# EAGLE board Qwiic GPS-RTK - ublox NEO-M8P-Panel (EAGLE 9.1.1), part 1 of 2
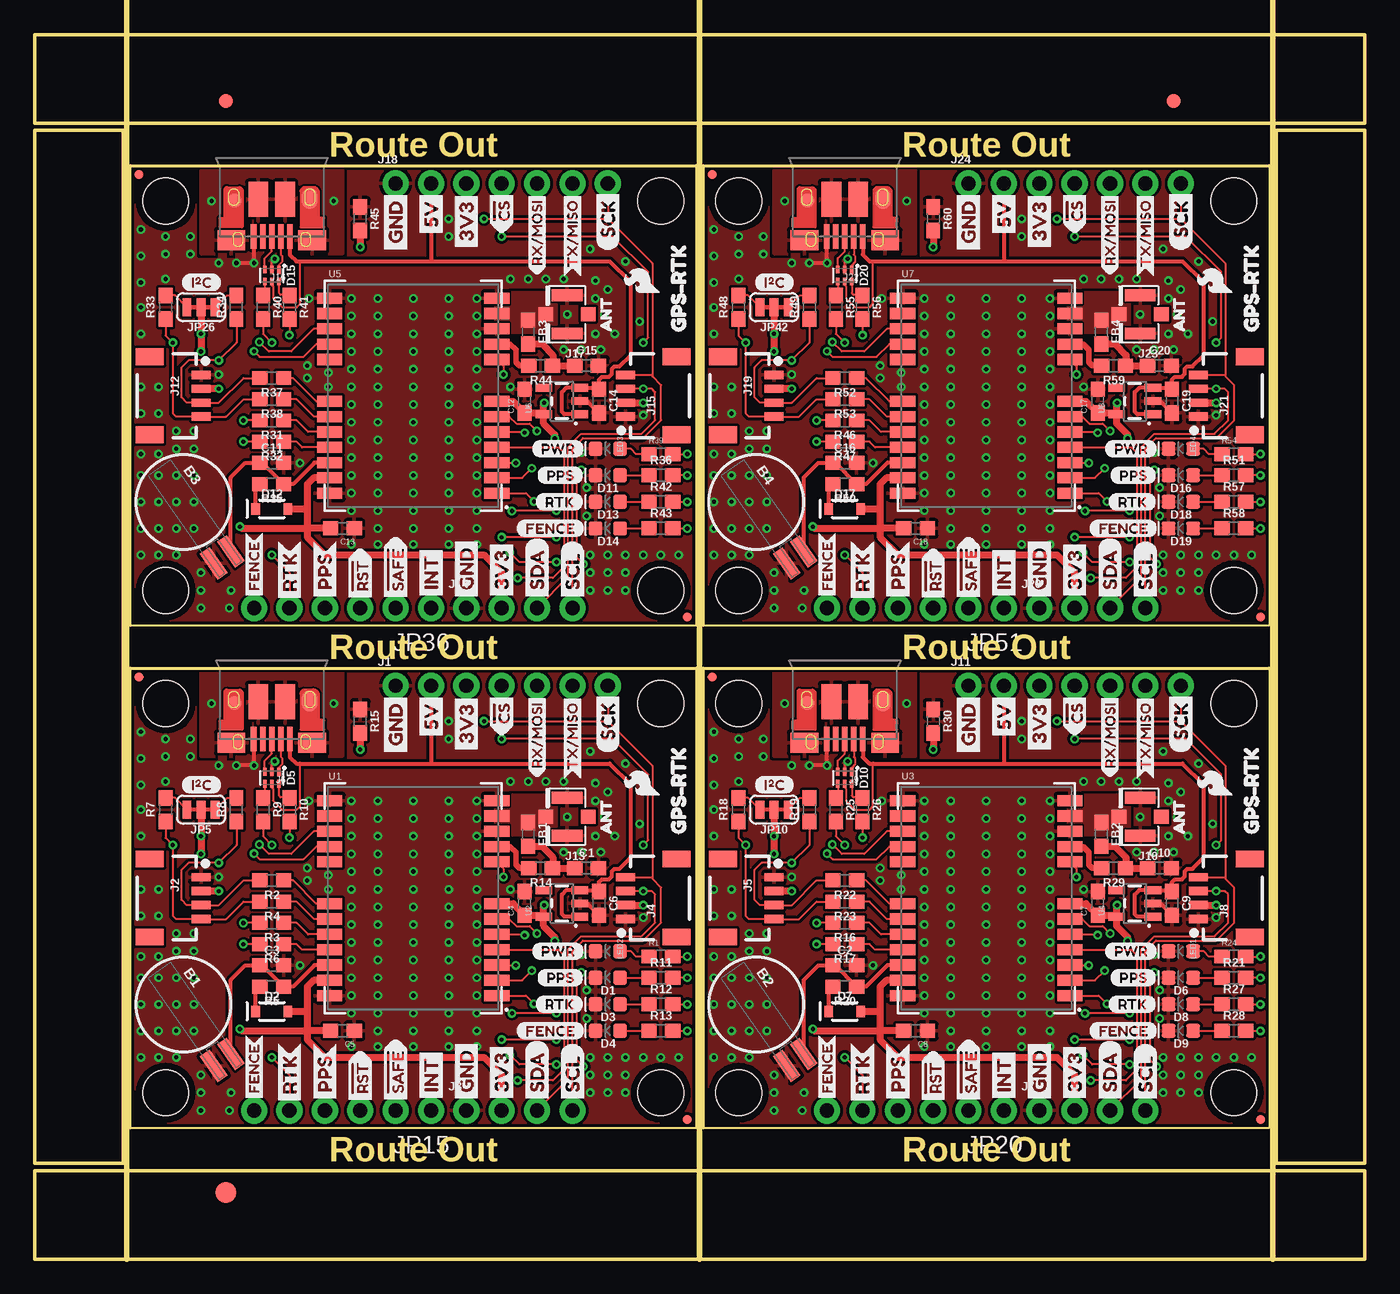
[diagram p0: board, top side]
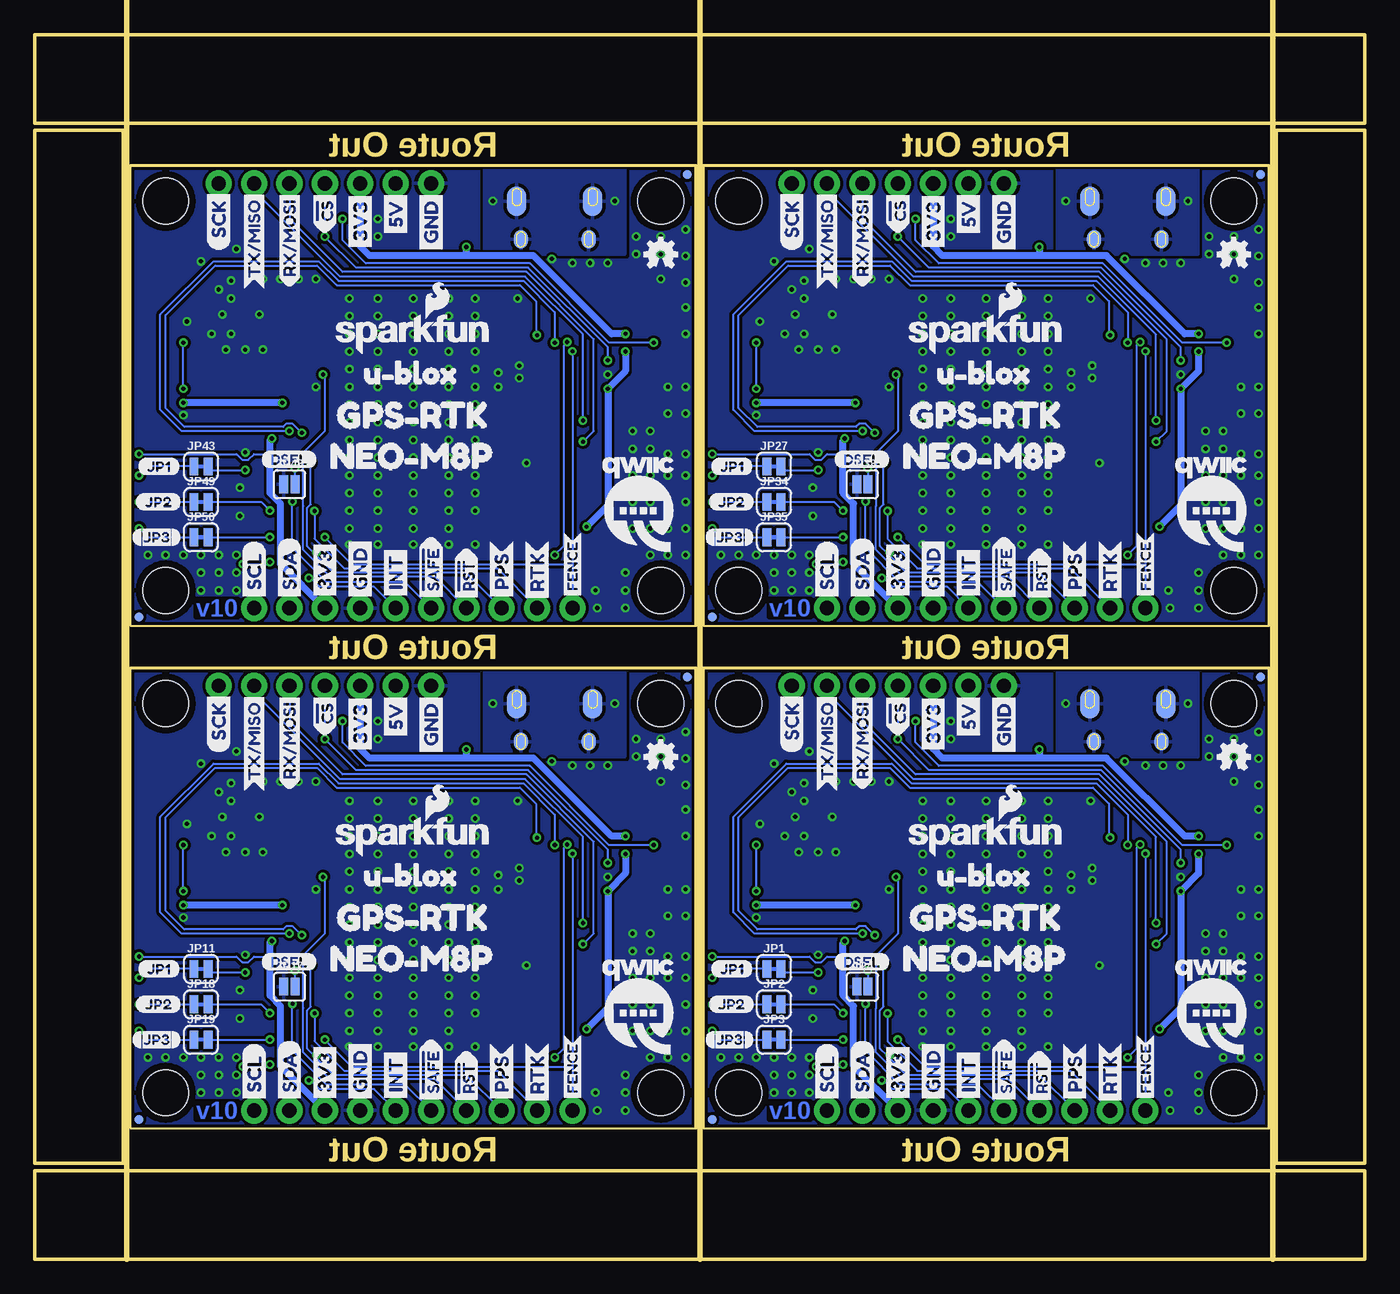
[diagram p1: board, bottom side, seen from below]

Size 95.5 x 87.88 mm. Coordinates in mm from the lower left corner, seen from the top.
Outline: 6.86,9.4 6.86,42.42 47.5,42.42 47.5,9.4 6.86,9.4
Outline: 48.01,9.4 48.01,42.42 88.65,42.42 88.65,9.4 48.01,9.4
Outline: 6.86,45.47 6.86,78.49 47.5,78.49 47.5,45.47 6.86,45.47
Outline: 48.01,45.47 48.01,78.49 88.65,78.49 88.65,45.47 48.01,45.47
Outline: 0,6.35 95.5,6.35 95.5,0 0,0 0,6.35
Outline: 89.15,81.03 95.5,81.03 95.5,6.86 89.15,6.86 89.15,81.03
Outline: 0,87.88 95.5,87.88 95.5,81.53 0,81.53 0,87.88
Outline: 0,81.03 6.35,81.03 6.35,6.86 0,6.86 0,81.03
Copper layers (1*16): Top 0.035mm / dielectric 1.5mm / Bottom 0.035mm
Design rules "SparkFun-2-layer-PCBWay-LIMIT": minimum track width 6mil, minimum drill 0.3mm, track to track 6mil, track to pad 6mil, pad to pad 6mil, via to via 6mil, smd to smd 6mil, copper to edge 6mil, drill to drill 6mil, minimum pad ring 6mil, minimum via ring 6mil, stop-mask expansion 4mil, vias tented up to drill 25mil, thermal gap 10mil
Net classes: 2 3.3V: width 0.508 mm
Milling: 3 lines

## Footprints (pad centres in the part's own frame; a part is rotated, then mirrored left to right if it is on the bottom)
BATTCON-6.8MM = smd 2.25 x 0.85: + 4.87,0.75; - 4.87,-0.75
0603 = smd 1.1 x 1: 1 -0.85,0; 2 0.85,0
LED-0603 = smd 1 x 1: A -0.877,0; C 0.877,0
SOD-323 = smd 0.63 x 0.83: A 1.15,0; C -1.15,0
SOT886 = smd 0.61 x 0.25: 1 -0.405,0.5 | smd 0.56 x 0.25: 2 -0.43,0; 3 -0.43,-0.5; 4 0.43,-0.5; 5 0.43,0; 6 0.43,0.5
FIDUCIAL-1X2 = smd 1 x 1: 1 0,0
FIDUCIAL-1.5X3 = smd 1.5 x 1.5: 1 0,0
1X07_NO_SILK = drill 1.016 pad 1.88: 1 0,0; 2 2.54,0; 3 5.08,0; 4 7.62,0; 5 10.16,0; 6 12.7,0; 7 15.24,0
1X04_1MM_RA = smd 0.6 x 1.35: 1 -1.5,0; 2 -0.5,0; 3 0.5,0; 4 1.5,0 | smd 1.2 x 2: NC1 2.8,-3.675; NC2 -2.8,-3.675
1X04_NO_SILK = drill 1.016 pad 1.88: 1 0,0; 2 2.54,0; 3 5.08,0; 4 7.62,0
USB-MICROB-PTH-MILL = smd 0.4 x 1.75: D+ 0,0; D- -0.65,0; GND 1.3,0; ID 0.65,0; VBUS -1.3,0 | smd 2 x 1.46: SHIELD -2.9,0.275; SHIELD2 2.9,0.275 | smd 1.425 x 2.5: SHIELD3 -0.963,-2.675; SHIELD4 0.963,-2.675 | smd 1.4 x 2.1 bottom: SHIELD5 -2.731,-2.531; SHIELD7 2.729,-2.531 | smd 1 x 1: SHIELD6 2.7,-2.575 | smd 1.1 x 1.5: SHIELD8 -2.731,-2.731 | smd 1 x 1.3 bottom: SHIELD9 -2.43,0.195; SHIELD10 2.43,0.195
U.FL = smd 2.2 x 0.85: 1 0,1.375; 2 0,-1.375 | smd 1.05 x 1: FEED 1.525,0; NC -1.525,0
SMT-JUMPER_2_NC_TRACE_SILK = smd 0.635 x 1.27: 1 -0.508,0; 2 0.508,0
SMT-JUMPER_2_NO_SILK = smd 0.635 x 1.27: 1 -0.406,0; 2 0.406,0
SMT-JUMPER_3_2-NC_TRACE_SILK = smd 0.635 x 1.27: 1 -1.016,0; 2 0,0; 3 1.016,0
STAND-OFF = hole 3.302: 0,0
MICRO-FIDUCIAL = smd 0.635 x 0.635: 1 0,0
1X06_NO_SILK = drill 1.016 pad 1.88: 1 0,0; 2 2.54,0; 3 5.08,0; 4 7.62,0; 5 10.16,0; 6 12.7,0
NEO-M8P = smd 1.8 x 0.8: 1 6,-7; 2 6,-5.9; 3 6,-4.8; 4 6,-3.7; 5 6,-2.6; 6 6,-1.5; 7 6,-0.4; 8 6,2.6; 9 6,3.7; 10 6,4.8; 11 6,5.9; 12 6,7; 13 -6,7; 14 -6,5.9; 15 -6,4.8; 16 -6,3.7; 17 -6,2.6; 18 -6,-0.4; 19 -6,-1.5; 20 -6,-2.6; 21 -6,-3.7; 22 -6,-4.8; 23 -6,-5.9; 24 -6,-7
SOT23-5 = smd 0.55 x 1.2: 1 -0.95,-1.3; 2 0,-1.3; 3 0.95,-1.3; 4 0.95,1.3; 5 -0.95,1.3

## Placement (x,y rotation side)
B1  6.8MM_COIN_CELL  [BATTCON-6.8MM]  10.67,18.29 305 top
B2  6.8MM_COIN_CELL  [BATTCON-6.8MM]  51.82,18.29 305 top
B3  6.8MM_COIN_CELL  [BATTCON-6.8MM]  10.67,54.36 305 top
B4  6.8MM_COIN_CELL  [BATTCON-6.8MM]  51.82,54.36 305 top
C1  47pF  [0603]  39.62,28.07 0 top
C2  1.0uF  [0603]  58.17,21.08 0 top
C3  1.0uF  [0603]  17.02,21.08 0 top
C4  1.0uF  [0603]  35.18,25.53 90 top
C5  0.1uF  [0603]  22.1,16.38 180 top
C6  1.0uF  [0603]  40.51,25.53 270 top
C7  1.0uF  [0603]  76.33,25.53 90 top
C8  0.1uF  [0603]  63.25,16.38 180 top
C9  1.0uF  [0603]  81.66,25.53 270 top
C10  47pF  [0603]  80.77,28.07 0 top
C11  1.0uF  [0603]  17.02,57.15 0 top
C12  1.0uF  [0603]  35.18,61.59 90 top
C13  0.1uF  [0603]  22.1,52.45 180 top
C14  1.0uF  [0603]  40.51,61.59 270 top
C15  47pF  [0603]  39.62,64.14 0 top
C16  1.0uF  [0603]  58.17,57.15 0 top
C17  1.0uF  [0603]  76.33,61.59 90 top
C18  0.1uF  [0603]  63.25,52.45 180 top
C19  1.0uF  [0603]  81.66,61.59 270 top
C20  47pF  [0603]  80.77,64.14 0 top
D1  Yellow  [LED-0603]  41.15,20.19 180 top
D2  0.5A/40V/420mV  [SOD-323]  17.02,17.78 0 top
D3  GREEN  [LED-0603]  41.15,18.29 180 top
D4  BLUE  [LED-0603]  41.15,16.38 180 top
D5  PRTR5V0U2F  [SOT886]  17.02,34.54 270 top
D6  Yellow  [LED-0603]  82.3,20.19 180 top
D7  0.5A/40V/420mV  [SOD-323]  58.17,17.78 0 top
D8  GREEN  [LED-0603]  82.3,18.29 180 top
D9  BLUE  [LED-0603]  82.3,16.38 180 top
D10  PRTR5V0U2F  [SOT886]  58.17,34.54 270 top
D11  Yellow  [LED-0603]  41.15,56.26 180 top
D12  0.5A/40V/420mV  [SOD-323]  17.02,53.85 0 top
D13  GREEN  [LED-0603]  41.15,54.36 180 top
D14  BLUE  [LED-0603]  41.15,52.45 180 top
D15  PRTR5V0U2F  [SOT886]  17.02,70.61 270 top
D16  Yellow  [LED-0603]  82.3,56.26 180 top
D17  0.5A/40V/420mV  [SOD-323]  58.17,53.85 0 top
D18  GREEN  [LED-0603]  82.3,54.36 180 top
D19  BLUE  [LED-0603]  82.3,52.45 180 top
D20  PRTR5V0U2F  [SOT886]  58.17,70.61 270 top
E$1  [FIDUCIAL-1X2]  13.72,83.12 0 top
E$2  [FIDUCIAL-1X2]  81.79,83.12 0 top
E$3  [FIDUCIAL-1.5X3]  13.72,4.76 0 top
FB1  30Ω/1.8A  [0603]  35.43,30.48 270 top
FB2  30Ω/1.8A  [0603]  76.58,30.48 270 top
FB3  30Ω/1.8A  [0603]  35.43,66.55 270 top
FB4  30Ω/1.8A  [0603]  76.58,66.55 270 top
J1  [1X07_NO_SILK]  25.91,41.15 0 top
J2  [1X04_1MM_RA]  11.94,25.91 270 top
J3  PTH  [1X04_NO_SILK]  30.99,10.67 0 top
J4  [1X04_1MM_RA]  42.42,25.91 90 top
J5  [1X04_1MM_RA]  53.09,25.91 270 top
J6  [USB-MICROB-PTH-MILL]  17.02,37.34 180 top
J7  PTH  [1X04_NO_SILK]  72.14,10.67 0 top
J8  [1X04_1MM_RA]  83.57,25.91 90 top
J9  [USB-MICROB-PTH-MILL]  58.17,37.34 180 top
J10  U.FL  [U.FL]  79.38,31.75 180 top
J11  [1X07_NO_SILK]  67.06,41.15 0 top
J12  [1X04_1MM_RA]  11.94,61.98 270 top
J13  U.FL  [U.FL]  38.23,31.75 180 top
J14  PTH  [1X04_NO_SILK]  30.99,46.74 0 top
J15  [1X04_1MM_RA]  42.42,61.98 90 top
J16  [USB-MICROB-PTH-MILL]  17.02,73.41 180 top
J17  U.FL  [U.FL]  38.23,67.82 180 top
J18  [1X07_NO_SILK]  25.91,77.22 0 top
J19  [1X04_1MM_RA]  53.09,61.98 270 top
J20  PTH  [1X04_NO_SILK]  72.14,46.74 0 top
J21  [1X04_1MM_RA]  83.57,61.98 90 top
J22  [USB-MICROB-PTH-MILL]  58.17,73.41 180 top
J23  U.FL  [U.FL]  79.38,67.82 180 top
J24  [1X07_NO_SILK]  67.06,77.22 0 top
JP1  [SMT-JUMPER_2_NC_TRACE_SILK]  42.42,20.83 0 bottom
JP2  [SMT-JUMPER_2_NC_TRACE_SILK]  42.42,18.29 0 bottom
JP3  [SMT-JUMPER_2_NC_TRACE_SILK]  42.42,15.75 0 bottom
JP4  [SMT-JUMPER_2_NO_SILK]  36.07,19.56 0 bottom
JP5  [SMT-JUMPER_3_2-NC_TRACE_SILK]  11.94,32.26 180 top
JP6  STAND-OFF  [STAND-OFF]  50.55,39.88 0 top
JP7  STAND-OFF  [STAND-OFF]  86.11,39.88 0 top
JP8  FIDUCIALUFIDUCIAL  [MICRO-FIDUCIAL]  88.01,10.03 0 top
JP9  FIDUCIALUFIDUCIAL  [MICRO-FIDUCIAL]  48.64,41.78 0 top
JP10  [SMT-JUMPER_3_2-NC_TRACE_SILK]  53.09,32.26 180 top
JP11  [SMT-JUMPER_2_NC_TRACE_SILK]  83.57,20.83 0 bottom
JP12  FIDUCIALUFIDUCIAL  [MICRO-FIDUCIAL]  88.01,10.03 0 bottom
JP13  FIDUCIALUFIDUCIAL  [MICRO-FIDUCIAL]  48.64,41.78 0 bottom
JP14  STAND-OFF  [STAND-OFF]  50.55,11.94 0 top
JP15  [1X06_NO_SILK]  28.45,10.67 180 top
JP16  STAND-OFF  [STAND-OFF]  86.11,11.94 0 top
JP17  [SMT-JUMPER_2_NO_SILK]  77.22,19.56 0 bottom
JP18  [SMT-JUMPER_2_NC_TRACE_SILK]  83.57,18.29 0 bottom
JP19  [SMT-JUMPER_2_NC_TRACE_SILK]  83.57,15.75 0 bottom
JP20  [1X06_NO_SILK]  69.6,10.67 180 top
JP21  FIDUCIALUFIDUCIAL  [MICRO-FIDUCIAL]  46.86,10.03 0 top
JP22  STAND-OFF  [STAND-OFF]  9.4,75.95 0 top
JP23  STAND-OFF  [STAND-OFF]  44.96,75.95 0 top
JP24  FIDUCIALUFIDUCIAL  [MICRO-FIDUCIAL]  46.86,46.1 0 top
JP25  FIDUCIALUFIDUCIAL  [MICRO-FIDUCIAL]  7.49,77.85 0 top
JP26  [SMT-JUMPER_3_2-NC_TRACE_SILK]  11.94,68.33 180 top
JP27  [SMT-JUMPER_2_NC_TRACE_SILK]  42.42,56.9 0 bottom
JP28  FIDUCIALUFIDUCIAL  [MICRO-FIDUCIAL]  46.86,46.1 0 bottom
JP29  FIDUCIALUFIDUCIAL  [MICRO-FIDUCIAL]  7.49,77.85 0 bottom
JP30  STAND-OFF  [STAND-OFF]  9.4,48.01 0 top
JP31  STAND-OFF  [STAND-OFF]  9.4,39.88 0 top
JP32  STAND-OFF  [STAND-OFF]  44.96,48.01 0 top
JP33  [SMT-JUMPER_2_NO_SILK]  36.07,55.63 0 bottom
JP34  [SMT-JUMPER_2_NC_TRACE_SILK]  42.42,54.36 0 bottom
JP35  [SMT-JUMPER_2_NC_TRACE_SILK]  42.42,51.82 0 bottom
JP36  [1X06_NO_SILK]  28.45,46.74 180 top
JP37  STAND-OFF  [STAND-OFF]  50.55,75.95 0 top
JP38  STAND-OFF  [STAND-OFF]  86.11,75.95 0 top
JP39  FIDUCIALUFIDUCIAL  [MICRO-FIDUCIAL]  88.01,46.1 0 top
JP40  FIDUCIALUFIDUCIAL  [MICRO-FIDUCIAL]  48.64,77.85 0 top
JP41  STAND-OFF  [STAND-OFF]  44.96,39.88 0 top
JP42  [SMT-JUMPER_3_2-NC_TRACE_SILK]  53.09,68.33 180 top
JP43  [SMT-JUMPER_2_NC_TRACE_SILK]  83.57,56.9 0 bottom
JP44  FIDUCIALUFIDUCIAL  [MICRO-FIDUCIAL]  88.01,46.1 0 bottom
JP45  FIDUCIALUFIDUCIAL  [MICRO-FIDUCIAL]  48.64,77.85 0 bottom
JP46  STAND-OFF  [STAND-OFF]  50.55,48.01 0 top
JP47  STAND-OFF  [STAND-OFF]  86.11,48.01 0 top
JP48  [SMT-JUMPER_2_NO_SILK]  77.22,55.63 0 bottom
JP49  [SMT-JUMPER_2_NC_TRACE_SILK]  83.57,54.36 0 bottom
JP50  [SMT-JUMPER_2_NC_TRACE_SILK]  83.57,51.82 0 bottom
JP51  [1X06_NO_SILK]  69.6,46.74 180 top
JP61  FIDUCIALUFIDUCIAL  [MICRO-FIDUCIAL]  7.49,41.78 0 top
JP71  FIDUCIALUFIDUCIAL  [MICRO-FIDUCIAL]  46.86,10.03 0 bottom
JP81  FIDUCIALUFIDUCIAL  [MICRO-FIDUCIAL]  7.49,41.78 0 bottom
JP91  STAND-OFF  [STAND-OFF]  9.4,11.94 0 top
JP101  STAND-OFF  [STAND-OFF]  44.96,11.94 0 top
LED1  RED  [LED-0603]  82.3,22.1 180 top
LED2  RED  [LED-0603]  41.15,22.1 180 top
LED3  RED  [LED-0603]  41.15,58.17 180 top
LED4  RED  [LED-0603]  82.3,58.17 180 top
LOGO1  OSHW-LOGOMINI  [OSHW-LOGO-MINI]  9.4,36.07 0 bottom
LOGO2  SFE_LOGO_NAME_FLAME.1_INCH  [SFE_LOGO_NAME_FLAME_.1]  33.15,28.83 0 bottom
LOGO3  OSHW-LOGOMINI  [OSHW-LOGO-MINI]  50.55,36.07 0 bottom
LOGO4  SFE_LOGO_NAME_FLAME.1_INCH  [SFE_LOGO_NAME_FLAME_.1]  74.3,28.83 0 bottom
LOGO5  OSHW-LOGOMINI  [OSHW-LOGO-MINI]  9.4,72.14 0 bottom
LOGO6  SFE_LOGO_NAME_FLAME.1_INCH  [SFE_LOGO_NAME_FLAME_.1]  33.15,64.9 0 bottom
LOGO7  OSHW-LOGOMINI  [OSHW-LOGO-MINI]  50.55,72.14 0 bottom
LOGO8  SFE_LOGO_NAME_FLAME.1_INCH  [SFE_LOGO_NAME_FLAME_.1]  74.3,64.9 0 bottom
R1  1k  [0603]  44.96,21.72 0 top
R2  33  [0603]  17.02,27.18 180 top
R3  33  [0603]  17.02,24.13 180 top
R4  33  [0603]  17.02,25.65 180 top
R5  1k  [0603]  17.02,19.56 180 top
R6  33  [0603]  17.02,22.61 180 top
R7  2.2k  [0603]  9.4,32.26 90 top
R8  2.2k  [0603]  14.48,32.26 90 top
R9  27  [0603]  16.38,32.26 270 top
R10  27  [0603]  18.29,32.26 270 top
R11  1k  [0603]  44.96,20.19 0 top
R12  1k  [0603]  44.96,18.29 0 top
R13  1k  [0603]  44.96,16.38 0 top
R14  10  [0603]  36.32,28.07 180 top
R15  100k  [0603]  23.37,38.61 270 top
R16  33  [0603]  58.17,24.13 180 top
R17  33  [0603]  58.17,22.61 180 top
R18  2.2k  [0603]  50.55,32.26 90 top
R19  2.2k  [0603]  55.63,32.26 90 top
R20  1k  [0603]  58.17,19.56 180 top
R21  1k  [0603]  86.11,20.19 0 top
R22  33  [0603]  58.17,27.18 180 top
R23  33  [0603]  58.17,25.65 180 top
R24  1k  [0603]  86.11,21.72 0 top
R25  27  [0603]  57.53,32.26 270 top
R26  27  [0603]  59.44,32.26 270 top
R27  1k  [0603]  86.11,18.29 0 top
R28  1k  [0603]  86.11,16.38 0 top
R29  10  [0603]  77.47,28.07 180 top
R30  100k  [0603]  64.52,38.61 270 top
R31  33  [0603]  17.02,60.2 180 top
R32  33  [0603]  17.02,58.67 180 top
R33  2.2k  [0603]  9.4,68.33 90 top
R34  2.2k  [0603]  14.48,68.33 90 top
R35  1k  [0603]  17.02,55.63 180 top
R36  1k  [0603]  44.96,56.26 0 top
R37  33  [0603]  17.02,63.25 180 top
R38  33  [0603]  17.02,61.72 180 top
R39  1k  [0603]  44.96,57.78 0 top
R40  27  [0603]  16.38,68.33 270 top
R41  27  [0603]  18.29,68.33 270 top
R42  1k  [0603]  44.96,54.36 0 top
R43  1k  [0603]  44.96,52.45 0 top
R44  10  [0603]  36.32,64.14 180 top
R45  100k  [0603]  23.37,74.68 270 top
R46  33  [0603]  58.17,60.2 180 top
R47  33  [0603]  58.17,58.67 180 top
R48  2.2k  [0603]  50.55,68.33 90 top
R49  2.2k  [0603]  55.63,68.33 90 top
R50  1k  [0603]  58.17,55.63 180 top
R51  1k  [0603]  86.11,56.26 0 top
R52  33  [0603]  58.17,63.25 180 top
R53  33  [0603]  58.17,61.72 180 top
R54  1k  [0603]  86.11,57.78 0 top
R55  27  [0603]  57.53,68.33 270 top
R56  27  [0603]  59.44,68.33 270 top
R57  1k  [0603]  86.11,54.36 0 top
R58  1k  [0603]  86.11,52.45 0 top
R59  10  [0603]  77.47,64.14 180 top
R60  100k  [0603]  64.52,74.68 270 top
U1  NEO-M8P  [NEO-M8P]  27.18,25.91 0 top
U2  3.3V  [SOT23-5]  37.85,25.53 90 top
U3  NEO-M8P  [NEO-M8P]  68.33,25.91 0 top
U4  3.3V  [SOT23-5]  78.99,25.53 90 top
U5  NEO-M8P  [NEO-M8P]  27.18,61.98 0 top
U6  3.3V  [SOT23-5]  37.85,61.59 90 top
U7  NEO-M8P  [NEO-M8P]  68.33,61.98 0 top
U8  3.3V  [SOT23-5]  78.99,61.59 90 top
U$1  [SDA-[)]  36.07,11.05 90 top
U$2  [SDA-[)]  77.22,11.05 90 top
U$3  [SCL-[)]  38.61,11.05 90 top
U$4  [SDA-[)]  36.07,11.05 90 bottom
U$5  [SCL-[)]  38.61,11.05 90 bottom
U$6  [3V3-04]  33.53,11.05 90 top
U$7  [3V3-04]  33.53,11.05 90 bottom
U$8  [GND-04]  30.99,11.05 90 top
U$9  [GND-04]  30.99,11.05 90 bottom
U$10  [I_SUPER2_C-()-03]  10.54,34.04 0 top
U$11  [FENCE2]  34.54,16.38 0 top
U$12  [JP20]  47.12,18.29 0 bottom
U$13  [RTK1]  35.94,18.29 0 top
U$14  [FENCE0]  15.75,11.18 90 top
U$15  [INT8]  28.45,11.05 90 top
U$16  [INT8]  28.45,11.05 90 bottom
U$17  [FENCE0]  15.75,11.18 90 bottom
U$18  [PWR-()-03]  35.69,22.1 0 top
U$19  [5V]  28.45,37.08 90 top
U$20  [5V]  28.45,37.08 90 bottom
U$21  [GPS#RTK0]  46.23,29.59 90 top
U$22  [U#BLOX3]  32.13,27.56 0 bottom
U$23  [CS#-<]]  33.53,37.34 90 top
U$24  [CS#-<]]  33.53,37.34 90 bottom
U$25  [JP10]  46.99,20.83 0 bottom
U$26  [RX#MOSI2]  36.07,34.54 90 top
U$27  [DSEL0]  38.1,21.34 0 bottom
U$28  [RTK1]  18.29,10.92 90 bottom
U$29  [RTK1]  18.29,10.92 90 top
U$30  [QWIIC-LOGO-MEDIUM]  11.05,18.16 0 bottom
U$31  [RX#MOSI3]  36.07,33.66 90 bottom
U$32  [JP32]  47.37,15.75 0 bottom
U$33  [SFE_LOGO_FLAME_.1]  45.21,33.02 90 top
U$34  [TX#MISO0]  38.61,34.42 90 top
U$35  [#RST3]  23.37,10.79 90 top
U$36  [#RST3]  23.37,10.79 90 bottom
U$37  [TX#MISO1]  38.61,33.53 90 bottom
U$38  [SCK-(]-04]  41.15,36.32 90 top
U$39  [#SAFE1]  25.91,10.79 90 top
U$40  [#SAFE1]  25.91,10.79 90 bottom
U$41  [SCK-(]-04]  41.15,36.32 90 bottom
U$42  [SCL-[)]  79.76,11.05 90 top
U$43  [PPS5]  20.83,11.05 90 top
U$44  [PPS5]  20.83,11.05 90 bottom
U$45  [SDA-[)]  77.22,11.05 90 bottom
U$46  [SCL-[)]  79.76,11.05 90 bottom
U$47  [3V3-04]  74.68,11.05 90 top
U$48  [3V3-04]  74.68,11.05 90 bottom
U$49  [GND-04]  72.14,11.05 90 top
U$50  [GND-04]  72.14,11.05 90 bottom
U$51  [I_SUPER2_C-()-03]  51.69,34.04 0 top
U$52  [PPS0]  36.07,20.19 0 top
U$53  [NEO#M8P3]  34.8,21.59 0 bottom
U$54  [GPS#RTK1]  34.29,24.51 0 bottom
U$55  [ANT0]  41.02,29.84 90 top
U$56  [INT8]  69.6,11.05 90 top
U$57  [INT8]  69.6,11.05 90 bottom
U$58  [U#BLOX3]  73.28,27.56 0 bottom
U$59  [QWIIC-LOGO-MEDIUM]  52.2,18.16 0 bottom
U$60  [3V3-04]  30.99,36.07 90 bottom
U$61  [3V3-04]  30.99,36.07 90 top
U$62  [GND-04]  25.91,35.94 90 bottom
U$63  [GND-04]  25.91,35.94 90 top
U$64  [#RST3]  64.52,10.79 90 top
U$65  [#RST3]  64.52,10.79 90 bottom
U$66  [#SAFE1]  67.06,10.79 90 top
U$67  [#SAFE1]  67.06,10.79 90 bottom
U$68  [PPS5]  61.98,11.05 90 top
U$69  [PPS5]  61.98,11.05 90 bottom
U$70  [PPS0]  77.22,20.19 0 top
U$71  [FENCE2]  75.69,16.38 0 top
U$72  [JP20]  88.27,18.29 0 bottom
U$73  [RTK1]  77.09,18.29 0 top
U$74  [FENCE0]  56.9,11.18 90 top
U$75  [FENCE0]  56.9,11.18 90 bottom
U$76  [RTK1]  59.44,10.92 90 bottom
U$77  [RTK1]  59.44,10.92 90 top
U$78  [3V3-04]  72.14,36.07 90 bottom
U$79  [3V3-04]  72.14,36.07 90 top
U$80  [GND-04]  67.06,35.94 90 bottom
U$81  [GND-04]  67.06,35.94 90 top
U$82  [GPS#RTK0]  87.38,29.59 90 top
U$83  [JP10]  88.14,20.83 0 bottom
U$84  [JP32]  88.52,15.75 0 bottom
U$85  [DSEL0]  79.25,21.34 0 bottom
U$86  [NEO#M8P3]  75.95,21.59 0 bottom
U$87  [GPS#RTK1]  75.44,24.51 0 bottom
U$88  [ANT0]  82.17,29.84 90 top
U$89  [PWR-()-03]  76.84,22.1 0 top
U$90  [5V]  69.6,37.08 90 top
U$91  [5V]  69.6,37.08 90 bottom
U$92  [CS#-<]]  74.68,37.34 90 top
U$93  [CS#-<]]  74.68,37.34 90 bottom
U$94  [SCK-(]-04]  82.3,36.32 90 top
U$95  [SCK-(]-04]  82.3,36.32 90 bottom
U$96  [SFE_LOGO_FLAME_.1]  86.36,33.02 90 top
U$97  [RX#MOSI2]  77.22,34.54 90 top
U$98  [RX#MOSI3]  77.22,33.66 90 bottom
U$99  [TX#MISO0]  79.76,34.42 90 top
U$100  [TX#MISO1]  79.76,33.53 90 bottom
U$101  [SDA-[)]  36.07,47.12 90 top
U$102  [SCL-[)]  38.61,47.12 90 top
U$103  [SDA-[)]  36.07,47.12 90 bottom
U$104  [SCL-[)]  38.61,47.12 90 bottom
U$105  [3V3-04]  33.53,47.12 90 top
U$106  [3V3-04]  33.53,47.12 90 bottom
U$107  [GND-04]  30.99,47.12 90 top
U$108  [GND-04]  30.99,47.12 90 bottom
U$109  [I_SUPER2_C-()-03]  10.54,70.1 0 top
U$110  [INT8]  28.45,47.12 90 top
U$111  [INT8]  28.45,47.12 90 bottom
U$112  [U#BLOX3]  32.13,63.63 0 bottom
U$113  [QWIIC-LOGO-MEDIUM]  11.05,54.23 0 bottom
U$114  [#RST3]  23.37,46.86 90 top
U$115  [#RST3]  23.37,46.86 90 bottom
U$116  [#SAFE1]  25.91,46.86 90 top
U$117  [#SAFE1]  25.91,46.86 90 bottom
U$118  [PPS5]  20.83,47.12 90 top
U$119  [PPS5]  20.83,47.12 90 bottom
U$120  [PPS0]  36.07,56.26 0 top
U$121  [FENCE2]  34.54,52.45 0 top
U$122  [JP20]  47.12,54.36 0 bottom
U$123  [RTK1]  35.94,54.36 0 top
U$124  [FENCE0]  15.75,47.24 90 top
U$125  [FENCE0]  15.75,47.24 90 bottom
U$126  [RTK1]  18.29,46.99 90 bottom
U$127  [RTK1]  18.29,46.99 90 top
U$128  [3V3-04]  30.99,72.14 90 bottom
U$129  [3V3-04]  30.99,72.14 90 top
U$130  [GND-04]  25.91,72.01 90 bottom
U$131  [GND-04]  25.91,72.01 90 top
U$132  [GPS#RTK0]  46.23,65.66 90 top
U$133  [JP10]  46.99,56.9 0 bottom
U$134  [JP32]  47.37,51.82 0 bottom
U$135  [DSEL0]  38.1,57.4 0 bottom
U$136  [NEO#M8P3]  34.8,57.66 0 bottom
U$137  [GPS#RTK1]  34.29,60.58 0 bottom
U$138  [ANT0]  41.02,65.91 90 top
U$139  [PWR-()-03]  35.69,58.17 0 top
U$140  [5V]  28.45,73.15 90 top
U$141  [5V]  28.45,73.15 90 bottom
U$142  [CS#-<]]  33.53,73.41 90 top
U$143  [CS#-<]]  33.53,73.41 90 bottom
U$144  [SCK-(]-04]  41.15,72.39 90 top
U$145  [SCK-(]-04]  41.15,72.39 90 bottom
U$146  [SFE_LOGO_FLAME_.1]  45.21,69.09 90 top
U$147  [RX#MOSI2]  36.07,70.61 90 top
U$148  [RX#MOSI3]  36.07,69.72 90 bottom
U$149  [TX#MISO0]  38.61,70.48 90 top
U$150  [TX#MISO1]  38.61,69.6 90 bottom
U$151  [SDA-[)]  77.22,47.12 90 top
U$152  [SCL-[)]  79.76,47.12 90 top
U$153  [SDA-[)]  77.22,47.12 90 bottom
U$154  [SCL-[)]  79.76,47.12 90 bottom
U$155  [3V3-04]  74.68,47.12 90 top
U$156  [3V3-04]  74.68,47.12 90 bottom
U$157  [GND-04]  72.14,47.12 90 top
U$158  [GND-04]  72.14,47.12 90 bottom
U$159  [I_SUPER2_C-()-03]  51.69,70.1 0 top
U$160  [INT8]  69.6,47.12 90 top
U$161  [INT8]  69.6,47.12 90 bottom
U$162  [U#BLOX3]  73.28,63.63 0 bottom
U$163  [QWIIC-LOGO-MEDIUM]  52.2,54.23 0 bottom
U$164  [#RST3]  64.52,46.86 90 top
U$165  [#RST3]  64.52,46.86 90 bottom
U$166  [#SAFE1]  67.06,46.86 90 top
U$167  [#SAFE1]  67.06,46.86 90 bottom
U$168  [PPS5]  61.98,47.12 90 top
U$169  [PPS5]  61.98,47.12 90 bottom
U$170  [PPS0]  77.22,56.26 0 top
U$171  [FENCE2]  75.69,52.45 0 top
U$172  [JP20]  88.27,54.36 0 bottom
U$173  [RTK1]  77.09,54.36 0 top
U$174  [FENCE0]  56.9,47.24 90 top
U$175  [FENCE0]  56.9,47.24 90 bottom
U$176  [RTK1]  59.44,46.99 90 bottom
U$177  [RTK1]  59.44,46.99 90 top
U$178  [3V3-04]  72.14,72.14 90 bottom
U$179  [3V3-04]  72.14,72.14 90 top
U$180  [GND-04]  67.06,72.01 90 bottom
U$181  [GND-04]  67.06,72.01 90 top
U$182  [GPS#RTK0]  87.38,65.66 90 top
U$183  [JP10]  88.14,56.9 0 bottom
U$184  [JP32]  88.52,51.82 0 bottom
U$185  [DSEL0]  79.25,57.4 0 bottom
U$186  [NEO#M8P3]  75.95,57.66 0 bottom
U$187  [GPS#RTK1]  75.44,60.58 0 bottom
U$188  [ANT0]  82.17,65.91 90 top
U$189  [PWR-()-03]  76.84,58.17 0 top
U$190  [5V]  69.6,73.15 90 top
U$191  [5V]  69.6,73.15 90 bottom
U$192  [CS#-<]]  74.68,73.41 90 top
U$193  [CS#-<]]  74.68,73.41 90 bottom
U$194  [SCK-(]-04]  82.3,72.39 90 top
U$195  [SCK-(]-04]  82.3,72.39 90 bottom
U$196  [SFE_LOGO_FLAME_.1]  86.36,69.09 90 top
U$197  [RX#MOSI2]  77.22,70.61 90 top
U$198  [RX#MOSI3]  77.22,69.72 90 bottom
U$199  [TX#MISO0]  79.76,70.48 90 top
U$200  [TX#MISO1]  79.76,69.6 90 bottom

## Library data of the parts
B1-B4 = SparkFun-Batteries; PROD_ID: BATT-13734
C1 C10 C15 C20 = SparkFun-Capacitors; PROD_ID: CAP-08913
C2-C4 C6 C7 C9 C11 C12 C14 C16 C17 C19 = SparkFun-Capacitors; PROD_ID: CAP-00868
C5 C8 C13 C18 = SparkFun-Capacitors; PROD_ID: CAP-00810
D1 D6 D11 D16 = SparkFun-LED; PROD_ID: DIO-09003
D2 D7 D12 D17 = SparkFun-DiscreteSemi; PROD_ID: DIO-10955
D3 D8 D13 D18 = SparkFun-LED; PROD_ID: DIO-00821
D4 D9 D14 D19 = SparkFun-LED; PROD_ID: DIO-08575
D5 D10 D15 D20 = funbit
E$1 E$2 LOGO1-LOGO8 U$33 U$96 U$146 U$196 = SparkFun-Aesthetics
E$3 = SparkFun-Retired
FB1-FB4 = SparkFun-Coils; PROD_ID: NDUC-13805
J1 J11 J18 J24 = SparkFun-Connectors
J2 J4 J5 J8 J12 J15 J19 J21 = SparkFun-Connectors; PROD_ID: CONN-13694; VALUE: Qwiic Right Angle
J3 J7 J14 J20 = SparkX
J6 J9 J16 J22 = SparkFun-Connectors; PROD_ID: CONN-13711
J10 J13 J17 J23 = SparkFun-Connectors; PROD_ID: CONN-09193; SF_ID: WRL-09144
JP1-JP5 JP10 JP11 JP17-JP19 JP26 JP27 JP33-JP35 JP42 JP43 JP48-JP50 = SparkFun-Jumpers
JP6-JP9 JP12-JP14 JP16 JP21-JP25 JP28-JP32 JP37-JP41 JP44-JP47 JP61 JP71 JP81 JP91 JP101 = SparkFun
JP15 JP20 JP36 JP51 = SparkFun-Connectors; PROD_ID: CONN-08437
LED1-LED4 = SparkFun-LED; PROD_ID: DIO-00819
R1 R5 R11-R13 R20 R21 R24 R27 R28 R35 R36 R39 R42 R43 R50 R51 R54 R57 R58 = SparkFun-Resistors; PROD_ID: RES-07856
R2-R4 R6 R16 R17 R22 R23 R31 R32 R37 R38 R46 R47 R52 R53 = SparkFun-Resistors; PROD_ID: RES-08270
R7 R8 R18 R19 R33 R34 R48 R49 = SparkFun-Resistors; PROD_ID: RES-08272
R9 R10 R25 R26 R40 R41 R55 R56 = SparkFun-Resistors; PROD_ID: RES-09334
R14 R29 R44 R59 = SparkFun-Resistors; PROD_ID: RES-12581
R15 R30 R45 R60 = SparkFun-Resistors; PROD_ID: RES-07828
U1 U3 U5 U7 = NEO-M8P; PROD_ID: IC-14069
U2 U4 U6 U8 = SparkFun-IC-Power; PROD_ID: VREG-12457
U$1-U$10 U$18-U$20 U$23 U$24 U$30 U$38 U$41 U$42 U$45-U$51 U$59-U$63 U$78-U$81 U$89-U$95 U$101-U$109 U$113 U$128-U$131 U$139-U$145 U$151-U$159 U$163 U$178-U$181 U$189-U$195 = Labels
U$11-U$13 U$71-U$73 U$121-U$123 U$171-U$173 = buzzard_labels
U$14 U$17 U$28 U$29 U$74-U$77 U$124-U$127 U$174-U$177 = buzzard_labels (1)
U$15 U$16 U$22 U$25 U$32 U$56-U$58 U$83 U$84 U$110-U$112 U$133 U$134 U$160-U$162 U$183 U$184 = buzzard_labels (5)
U$21 U$82 U$132 U$182 = buzzard_labels (3)
U$26 U$31 U$34 U$37 U$97-U$100 U$147-U$150 U$197-U$200 = buzzard_labels (36)
U$27 U$85 U$135 U$185 = buzzard_labels (6)
U$35 U$36 U$39 U$40 U$43 U$44 U$53 U$64-U$69 U$86 U$114-U$119 U$136 U$164-U$169 U$186 = buzzard_labels (7)
U$52 U$70 U$120 U$170 = buzzard_labels (33)
U$54 U$87 U$137 U$187 = buzzard_labels (8)
U$55 U$88 U$138 U$188 = buzzard_labels (9)

## Nets
3.3V [3.3V]: C4.1 C5.2 D2.A J1.3 J2.2 J3.2 J4.2 JP5.2 R1.2 R15.2 U1.7 U1.23 U2.5
3.3V1 [3.3V]: C7.1 C8.2 D7.A J5.2 J7.2 J8.2 J11.3 JP10.2 R24.2 R30.2 U3.7 U3.23 U4.5
3.3V2 [3.3V]: C12.1 C13.2 D12.A J12.2 J14.2 J15.2 J18.3 JP26.2 R39.2 R45.2 U5.7 U5.23 U6.5
3.3V3 [3.3V]: C17.1 C18.2 D17.A J19.2 J20.2 J21.2 J24.3 JP42.2 R54.2 R60.2 U7.7 U7.23 U8.5
5V: C6.1 D5.5 J1.2 J6.VBUS U2.1 U2.3
5V1: C9.1 D10.5 J9.VBUS J11.2 U4.1 U4.3
5V2: C14.1 D15.5 J16.VBUS J18.2 U6.1 U6.3
5V3: C19.1 D20.5 J22.VBUS J24.2 U8.1 U8.3
!RESET: JP15.3 U1.8
!RESET1: JP20.3 U3.8
!RESET2: JP36.3 U5.8
!RESET3: JP51.3 U7.8
!SAFE: JP15.2 U1.1
!SAFE1: JP20.2 U3.1
!SAFE2: JP36.2 U5.1
!SAFE3: JP51.2 U7.1
ANT_VCC: C1.1 FB1.2 R14.1
ANT_VCC1: C10.1 FB2.2 R29.1
ANT_VCC2: C15.1 FB3.2 R44.1
ANT_VCC3: C20.1 FB4.2 R59.1
BACKUP: B1.+ C3.1 R5.1 U1.22
BACKUP1: B2.+ C2.1 R20.1 U3.22
BACKUP2: B3.+ C11.1 R35.1 U5.22
BACKUP3: B4.+ C16.1 R50.1 U7.22
D+: D5.4 R9.1
D+1: D10.4 R25.1
D+2: D15.4 R40.1
D+3: D20.4 R55.1
D-: D5.6 R10.1
D-1: D10.6 R26.1
D-2: D15.6 R41.1
D-3: D20.6 R56.1
D_SEL: JP4.2 U1.2
D_SEL1: JP17.2 U3.2
D_SEL2: JP33.2 U5.2
D_SEL3: JP48.2 U7.2
FENCE_STAT: JP3.2 JP15.6 U1.16
FENCE_STAT1: JP19.2 JP20.6 U3.16
FENCE_STAT2: JP35.2 JP36.6 U5.16
FENCE_STAT3: JP50.2 JP51.6 U7.16
GND: B1.- C1.2 C3.2 C4.2 C5.1 C6.2 D1.C D3.C D4.C D5.2 J1.1 J2.1 J3.1 J4.1 J6.GND J13.1 J13.2 JP4.1 LED2.C R15.1 U1.10 U1.12 U1.13 U1.24 U2.2
GND1: B2.- C2.2 C7.2 C8.1 C9.2 C10.2 D6.C D8.C D9.C D10.2 J5.1 J7.1 J8.1 J9.GND J10.1 J10.2 J11.1 JP17.1 LED1.C R30.1 U3.10 U3.12 U3.13 U3.24 U4.2
GND2: B3.- C11.2 C12.2 C13.1 C14.2 C15.2 D11.C D13.C D14.C D15.2 J12.1 J14.1 J15.1 J16.GND J17.1 J17.2 J18.1 JP33.1 LED3.C R45.1 U5.10 U5.12 U5.13 U5.24 U6.2
GND3: B4.- C16.2 C17.2 C18.1 C19.2 C20.2 D16.C D18.C D19.C D20.2 J19.1 J20.1 J21.1 J22.GND J23.1 J23.2 J24.1 JP48.1 LED4.C R60.1 U7.10 U7.12 U7.13 U7.24 U8.2
GPS_ANT1: FB1.1 J13.FEED U1.11
GPS_ANT2: FB2.1 J10.FEED U3.11
GPS_ANT3: FB3.1 J17.FEED U5.11
GPS_ANT4: FB4.1 J23.FEED U7.11
INT: JP15.1 U1.4
INT1: JP20.1 U3.4
INT2: JP36.1 U5.4
INT3: JP51.1 U7.4
N$1: D3.A R12.1
N$2: D1.A R11.1
N$3: JP2.1 R12.2
N$4: JP1.1 R11.2
N$5: JP5.1 R8.2
N$6: D2.C R5.2
N$7: D4.A R13.1
N$8: JP5.3 R7.2
N$9: JP3.1 R13.2
N$10: LED2.A R1.1
N$11: R9.2 U1.6
N$12: R10.2 U1.5
N$13: R14.2 U1.9
N$14: JP10.1 R19.2
N$15: JP10.3 R18.2
N$16: D6.A R21.1
N$17: JP11.1 R21.2
N$18: D7.C R20.2
N$19: LED1.A R24.1
N$20: R25.2 U3.6
N$21: R26.2 U3.5
N$22: D8.A R27.1
N$23: JP18.1 R27.2
N$24: D9.A R28.1
N$25: JP19.1 R28.2
N$26: R29.2 U3.9
N$27: JP26.1 R34.2
N$28: JP26.3 R33.2
N$29: D11.A R36.1
N$30: JP27.1 R36.2
N$31: D12.C R35.2
N$32: LED3.A R39.1
N$33: R40.2 U5.6
N$34: R41.2 U5.5
N$35: D13.A R42.1
N$36: JP34.1 R42.2
N$37: D14.A R43.1
N$38: JP35.1 R43.2
N$39: R44.2 U5.9
N$40: JP42.1 R49.2
N$41: JP42.3 R48.2
N$42: D16.A R51.1
N$43: JP43.1 R51.2
N$44: D17.C R50.2
N$45: LED4.A R54.1
N$46: R55.2 U7.6
N$47: R56.2 U7.5
N$48: D18.A R57.1
N$49: JP49.1 R57.2
N$50: D19.A R58.1
N$51: JP50.1 R58.2
N$52: R59.2 U7.9
PPS: JP1.2 JP15.4 U1.3
PPS1: JP11.2 JP20.4 U3.3
PPS2: JP27.2 JP36.4 U5.3
PPS3: JP43.2 JP51.4 U7.3
RTK_STAT: JP2.2 JP15.5 U1.15
RTK_STAT1: JP18.2 JP20.5 U3.15
RTK_STAT2: JP34.2 JP36.5 U5.15
RTK_STAT3: JP49.2 JP51.5 U7.15
RXI/MOSI: J1.5 R6.2
RXI/MOSI1: J11.5 R17.2
RXI/MOSI2: J18.5 R32.2
RXI/MOSI3: J24.5 R47.2
RXLV: R6.1 U1.21
RXLV1: R17.1 U3.21
RXLV2: R32.1 U5.21
RXLV3: R47.1 U7.21
SCL/SCK: J1.7 J2.4 J3.4 J4.4 R4.2 R7.1
SCL/SCK1: J5.4 J7.4 J8.4 J11.7 R18.1 R23.2
SCL/SCK2: J12.4 J14.4 J15.4 J18.7 R33.1 R38.2
SCL/SCK3: J19.4 J20.4 J21.4 J24.7 R48.1 R53.2
SCL_LV: R4.1 U1.19
SCL_LV1: R23.1 U3.19
SCL_LV2: R38.1 U5.19
SCL_LV3: R53.1 U7.19
SDA/!CS: J1.4 J2.3 J3.3 J4.3 R2.2 R8.1
SDA/!CS1: J5.3 J7.3 J8.3 J11.4 R19.1 R22.2
SDA/!CS2: J12.3 J14.3 J15.3 J18.4 R34.1 R37.2
SDA/!CS3: J19.3 J20.3 J21.3 J24.4 R49.1 R52.2
SDA_LV: R2.1 U1.18
SDA_LV1: R22.1 U3.18
SDA_LV2: R37.1 U5.18
SDA_LV3: R52.1 U7.18
SHLD: J6.SHIELD J6.SHIELD2 J6.SHIELD3 J6.SHIELD4 J6.SHIELD5 J6.SHIELD6 J6.SHIELD7 J6.SHIELD8 J6.SHIELD9 J6.SHIELD10
SHLD1: J9.SHIELD J9.SHIELD2 J9.SHIELD3 J9.SHIELD4 J9.SHIELD5 J9.SHIELD6 J9.SHIELD7 J9.SHIELD8 J9.SHIELD9 J9.SHIELD10
SHLD2: J16.SHIELD J16.SHIELD2 J16.SHIELD3 J16.SHIELD4 J16.SHIELD5 J16.SHIELD6 J16.SHIELD7 J16.SHIELD8 J16.SHIELD9 J16.SHIELD10
SHLD3: J22.SHIELD J22.SHIELD2 J22.SHIELD3 J22.SHIELD4 J22.SHIELD5 J22.SHIELD6 J22.SHIELD7 J22.SHIELD8 J22.SHIELD9 J22.SHIELD10
TXLV: R3.1 U1.20
TXLV1: R16.1 U3.20
TXLV2: R31.1 U5.20
TXLV3: R46.1 U7.20
TXO/MISO: J1.6 R3.2
TXO/MISO1: J11.6 R16.2
TXO/MISO2: J18.6 R31.2
TXO/MISO3: J24.6 R46.2
USB_D+: D5.3 J6.D+
USB_D+1: D10.3 J9.D+
USB_D+2: D15.3 J16.D+
USB_D+3: D20.3 J22.D+
USB_D-: D5.1 J6.D-
USB_D-1: D10.1 J9.D-
USB_D-2: D15.1 J16.D-
USB_D-3: D20.1 J22.D-